# EAGLE board TopPanel-V4 (EAGLE 7.6.0)
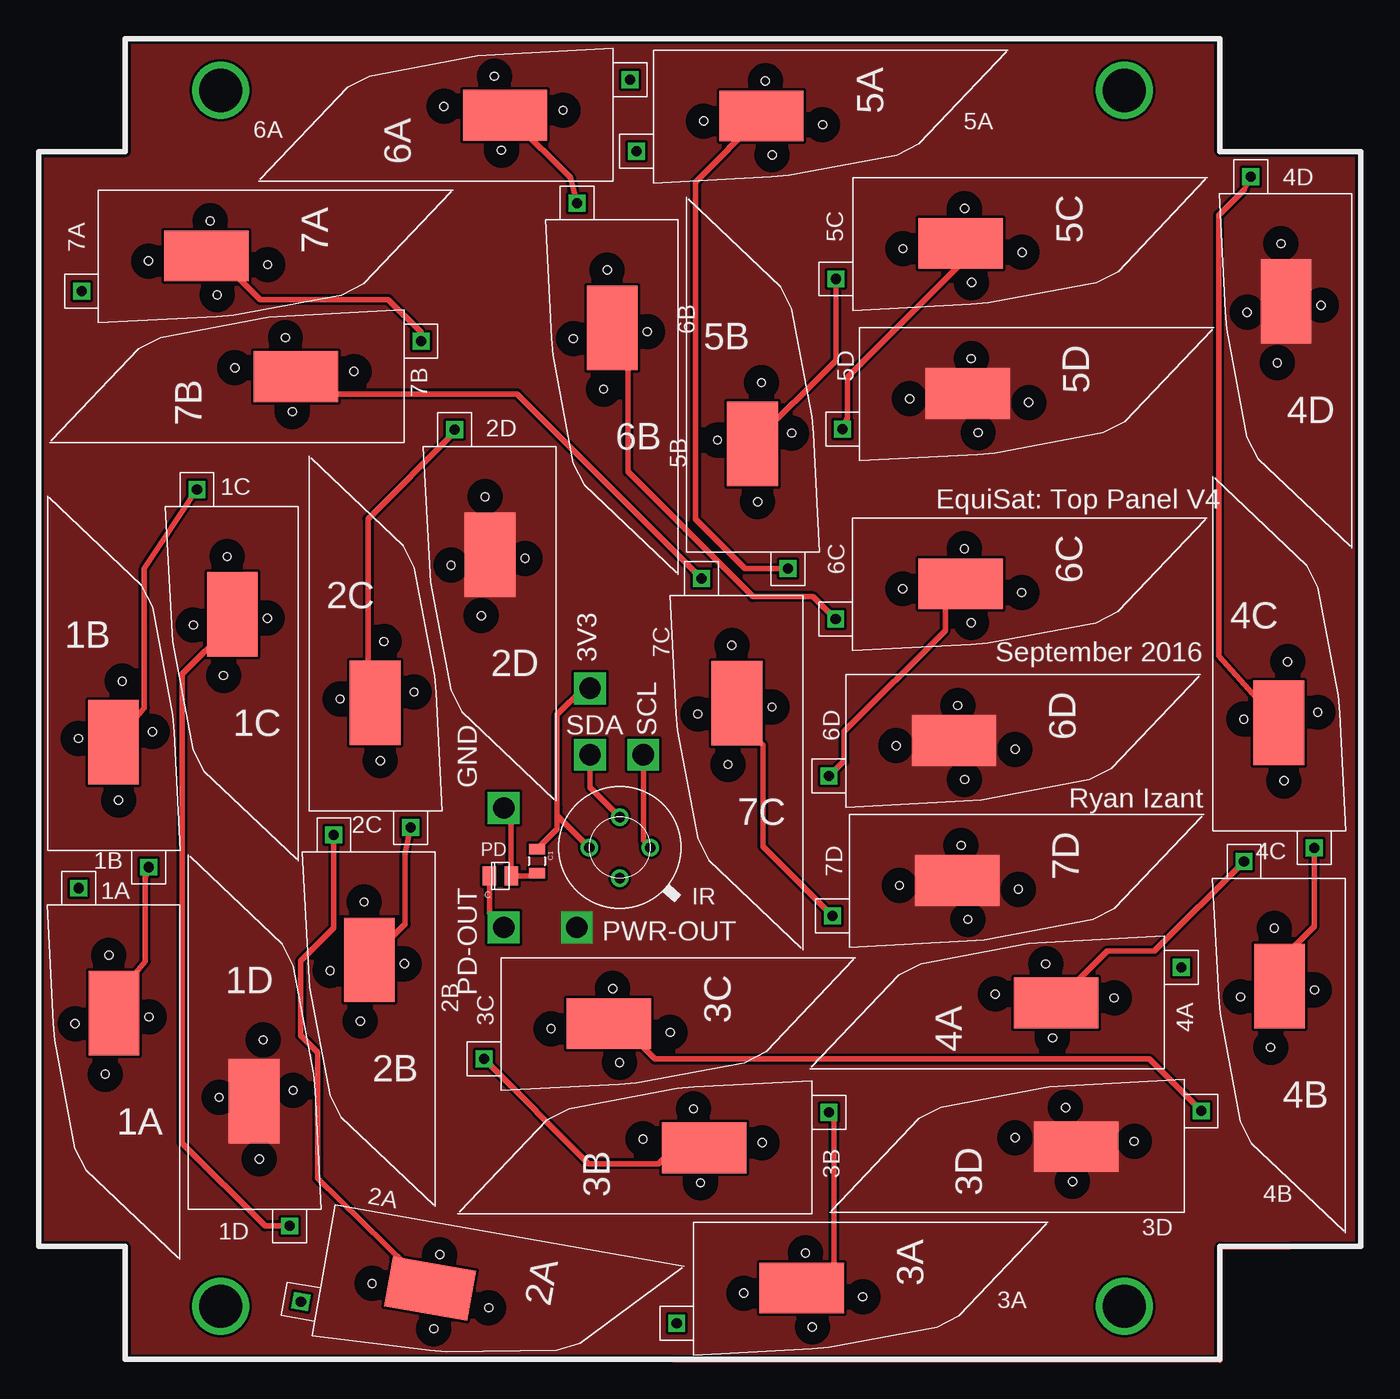
[diagram p0: board, top side]
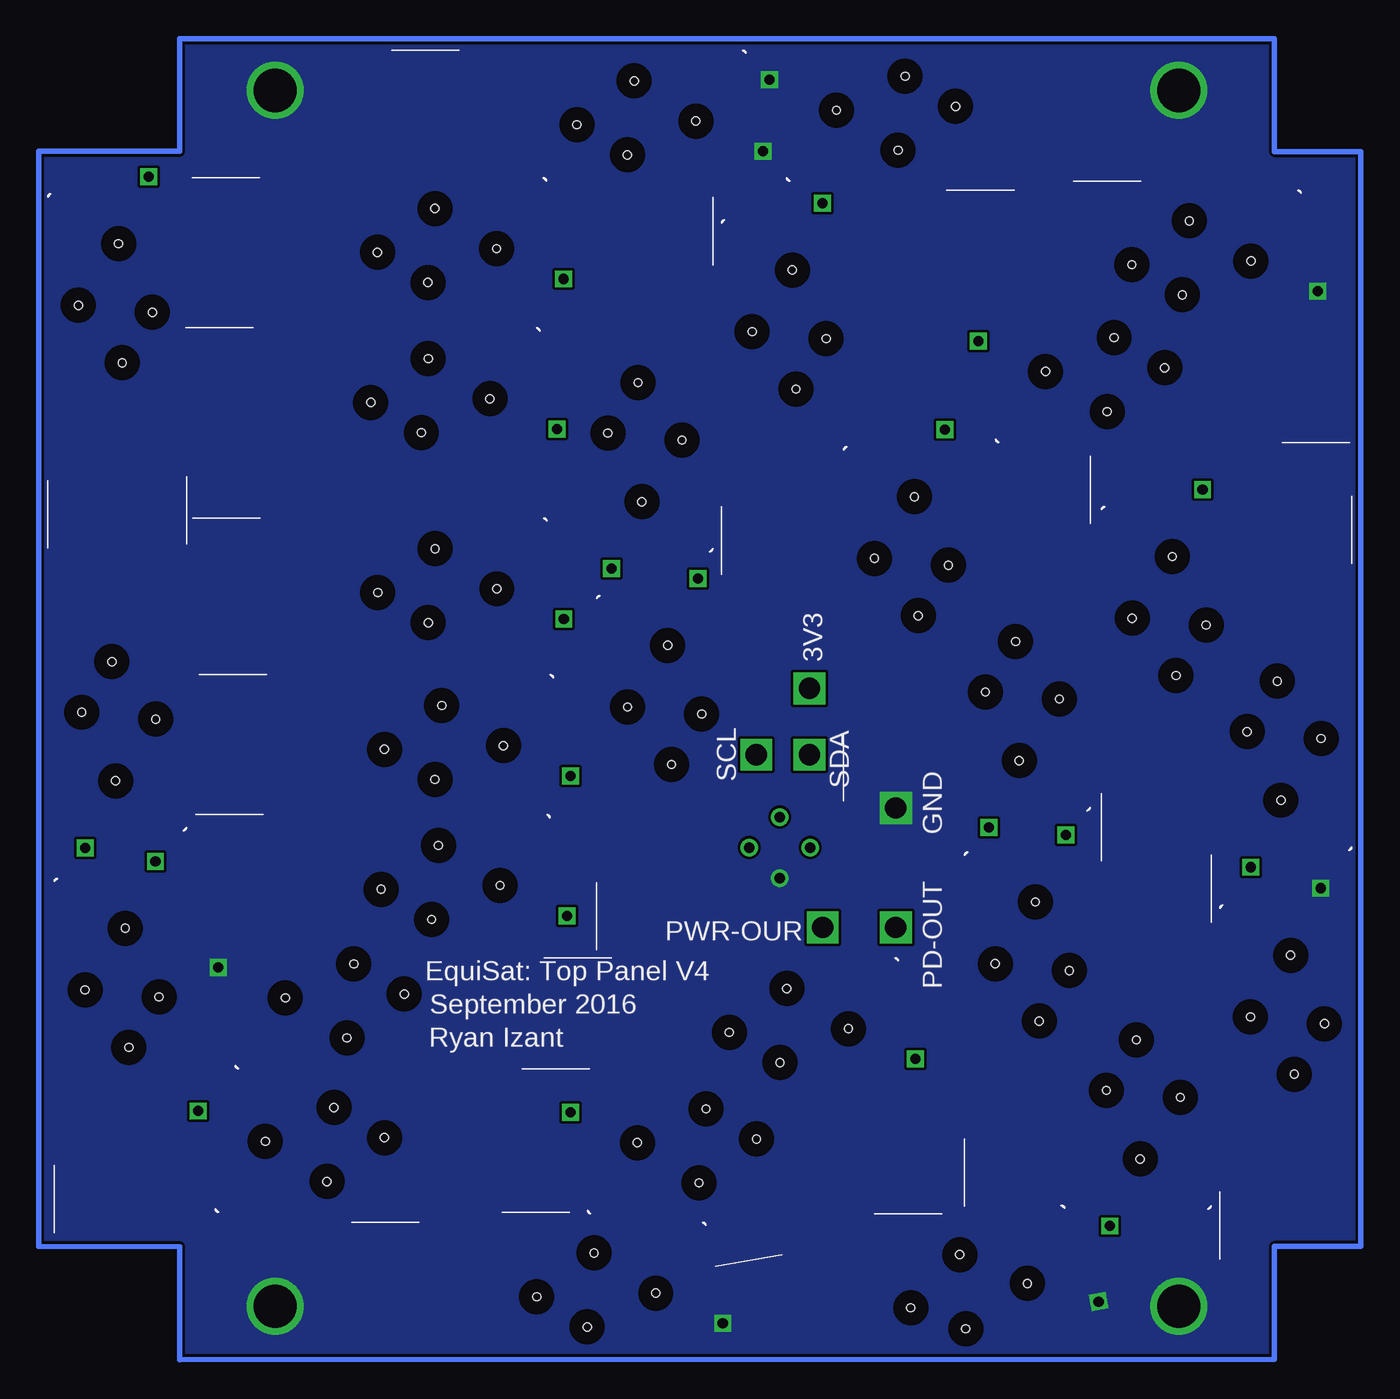
[diagram p1: board, bottom side, seen from below]

No outline drawn. Coordinates in mm, seen from the top.
Copper layers (1*16): Top 0.035mm / dielectric 1.5mm / Bottom 0.035mm
Design rules "default": minimum track width 10mil, minimum drill 24mil, track to track 8mil, track to pad 8mil, pad to pad 8mil, via to via 8mil, smd to smd 8mil, copper to edge 40mil, drill to drill 8mil, minimum pad ring 10mil, minimum via ring 8mil, stop-mask expansion 4mil, vias tented up to drill 0mil, thermal gap 10mil

## Footprints (pad centres in the part's own frame; a part is rotated, then mirrored left to right if it is on the bottom)
SOLARCELL2 = drill 0.76 square: A 7.62,-1.27 | smd 3.81 x 6.35: C 4.953,8.128 | hole 0.6: 2.32,8.41; 5.62,12.73; 7.89,8.93; 5.34,3.77
0805 = smd 0.8 x 1.2: 1 -0.9,0; 2 0.9,0
MXL90620 = drill 0.8: SCL 2.293,0; VDD -2.293,0; VSS 0,-2.294 | drill 0.8 pad 1.2: SDA 0,2.294
PHOTODECTORDEVICE2 = smd 1 x 1.45: A 0.76,0.4; C -0.88,0.4

## Placement (x,y rotation side)
1A  NEWSOLARPANEL  [SOLARCELL2]  4.13,34.19 180 top
1B  NEWSOLARPANEL  [SOLARCELL2]  -5.83,38.31 0 top
1C  NEWSOLARPANEL  [SOLARCELL2]  13.03,64.19 180 top
1D  NEWSOLARPANEL  [SOLARCELL2]  4.77,11.31 0 top
2A  NEWSOLARPANEL  [SOLARCELL2]  15.81,11.63 260 top
2B  NEWSOLARPANEL  [SOLARCELL2]  23.33,38.19 180 top
2C  NEWSOLARPANEL  [SOLARCELL2]  13.87,41.29 0 top
2D  NEWSOLARPANEL  [SOLARCELL2]  32.43,68.69 180 top
3A  NEWSOLARPANEL  [SOLARCELL2]  42.79,10.33 270 top
3B  NEWSOLARPANEL  [SOLARCELL2]  51.71,10.97 90 top
3C  NEWSOLARPANEL  [SOLARCELL2]  28.29,30.23 270 top
3D  NEWSOLARPANEL  [SOLARCELL2]  79.71,11.07 90 top
4A  NEWSOLARPANEL  [SOLARCELL2]  78.21,21.87 90 top
4B  NEWSOLARPANEL  [SOLARCELL2]  91.83,36.21 180 top
4C  NEWSOLARPANEL  [SOLARCELL2]  81.87,39.77 0 top
4D  NEWSOLARPANEL  [SOLARCELL2]  92.33,87.73 180 top
5A  NEWSOLARPANEL  [SOLARCELL2]  39.77,98.53 270 top
5B  NEWSOLARPANEL  [SOLARCELL2]  42.27,60.77 0 top
5C  NEWSOLARPANEL  [SOLARCELL2]  54.77,88.93 270 top
5D  NEWSOLARPANEL  [SOLARCELL2]  55.27,77.63 270 top
6A  NEWSOLARPANEL  [SOLARCELL2]  36.73,88.67 90 top
6B  NEWSOLARPANEL  [SOLARCELL2]  41.63,85.75 180 top
6C  NEWSOLARPANEL  [SOLARCELL2]  54.75,63.33 270 top
6D  NEWSOLARPANEL  [SOLARCELL2]  54.25,51.53 270 top
7A  NEWSOLARPANEL  [SOLARCELL2]  -2,88 270 top
7B  NEWSOLARPANEL  [SOLARCELL2]  21,69 90 top
7C  NEWSOLARPANEL  [SOLARCELL2]  51,57.5 180 top
7D  NEWSOLARPANEL  [SOLARCELL2]  54.5,41 270 top
C1  0.1uF  [0805]  31,37.5 270 top
IR  MXL90620  [MXL90620]  37.23,38.52 0 top
PD  PHOTODETECTOR  [PHOTODECTORDEVICE2]  28.3,35.98 0 top

## Library data of the parts
1A 1B 1C 1D 2A 2B 2C 2D 3A 3B 3C 3D 4A 4B 4C 4D 5A 5B 5C 5D 6A 6B 6C 6D 7A 7B 7C 7D PD = Solar Panel Parts
C1 IR = CNTRL_BOARD

## Nets
2D: 2C.C 2D.A
3V3: C1.1 IR.VDD
GND: 1A.A 2A.A 3A.A 4A.A 5A.A 6A.A 7A.A C1.2 IR.VSS PD.A
N$1: 1A.C 1B.A
N$2: 1B.C 1C.A
N$3: 1C.C 1D.A
N$4: 7A.C 7B.A
N$5: 7B.C 7C.A
N$6: 2A.C 2B.A
N$7: 2B.C 2C.A
N$8: 7C.C 7D.A
N$11: 3A.C 3B.A
N$12: 3B.C 3C.A
N$13: 3C.C 3D.A
N$16: 4A.C 4B.A
N$17: 4B.C 4C.A
N$18: 4C.C 4D.A
N$21: 5A.C 5B.A
N$22: 5B.C 5C.A
N$23: 5C.C 5D.A
N$26: 6A.C 6B.A
N$27: 6B.C 6C.A
N$28: 6C.C 6D.A
PD-OUT: PD.C
PWR-OUT: 1D.C 2D.C 3D.C 4D.C 5D.C 6D.C 7D.C
SCL: IR.SCL
SDA: IR.SDA

## Tracks (layer width: path | path; a pad name or v marks a point on that pad's centre or on a via)
2D
  Top 0.406: 2D.A 24.81,69.77 18.29,63.25 18.29,49.02 18.8,48.51 19.23,48.51 2C.C
3V3  (via drill 1.6)
  Top 0.406: IR.VDD 32.51,40.95 | 32.51,40.95 32.51,41.5 32.51,48.51 34.5,50.5 v35,50.5 | C1.1 32.51,39.91 32.51,40.95
GND  (via drill 1.6, 3.26)
  Top 0.406: C1.2 30.78,36.38 PD.A 29.06,40.94 v28.5,41.5
  other vias: 7.2,95.5 75.2,95.5 7.2,4 75.2,4
  pour Bottom (no thermals): -22,112 -22,-16 117,-16 117,112
N$1
  Top 0.406: 1A.C -0.82,27.12 1.52,29.96 1.52,36.27 1B.A
N$2
  Top 0.406: 1B.C -0.38,46.86 1.46,49.02 1.46,59.51 1C.A
N$3
  Top 0.406: 1D.A 10.53,10.04 4.32,16.26 4.32,51.56 7.87,55.12 7.87,55.86 1C.C
N$4
  Top 0.406: 7B.A 22.27,77.3 19.81,79.76 10.16,79.76 7.11,82.8 6.37,82.8 7A.C
N$5
  Top 0.406: 7C.A 29.51,72.64 15.49,72.64 14.48,73.66 13.97,73.66 13.68,73.95 7B.C
N$6
  Top 0.406: 2B.A 15.71,32.47 13.21,29.97 13.21,24.38 14.48,23.11 14.48,13.64 2A.C
N$7
  Top 0.406: 2B.C 21.08,32.77 21.08,38.11 2C.A
N$8
  Top 0.406: 7D.A 48.01,38.6 48.01,46.23 46.48,47.75 46.48,49.02 45.72,49.78 45.72,50.04 46.05,49.71 7C.C
N$9
  Top 0.406: 0,90.9 0,99.39 82.39,99.35 82.39,90.9 92.98,90.9 93,8.5 82.4,8.45 82.4,-0.05 0,0 0,8.5 -6.5,8.5 -6.5,90.9 0.02,90.9
N$10
  Bottom 0.406: -6.5,90.9 -6.5,8.5 0,8.5 0,0 82.4,-0.01 82.4,8.49 93,8.5 93,90.91 82.4,90.91 82.4,99.39 0,99.39 0,90.9 -6.5,90.9
N$11
  Top 0.406: 3A.C 51.86,5.38 53.34,6.86 53.34,18.95 3B.A
N$12
  Top 0.406: 3B.C 41.82,16.42 40.13,14.73 34.9,14.73 3C.A
N$13
  Top 0.406: 3C.C 37.21,25.28 39.88,22.61 77.06,22.61 3D.A
N$16
  Top 0.406: 4A.C 70.5,27.32 73.91,30.73 77.46,30.73 4B.A
N$17
  Top 0.406: 4B.C 85.88,28.98 89.49,32.59 4C.A
N$18
  Top 0.406: 4C.C 82.3,52.92 82.3,86.11 84.21,88.02 4D.A
N$21
  Top 0.406: 5A.C 42.93,88.61 42.93,63.25 46.67,59.5 5B.A
N$22
  Top 0.406: 5B.C 53.5,75.17 5C.A
N$23
  Top 0.406: 5D.A 54.36,70.87 54.36,73.91 62.9,82.46 5C.C
N$26
  Top 0.406: 6B.A 33.51,88.92 29.21,93.22 29.01,93.22 6A.C
N$27
  Top 0.406: 6C.A 51.79,57.4 47.24,57.4 37.85,66.8 37.85,75.44 36.18,77.11 6B.C
N$28
  Top 0.406: 6D.A 54.1,45.03 54.1,47.24 61.72,54.86 61.72,57.91 62.19,58.38 6C.C
PD-OUT  (via drill 1.6)
  Top 0.406: v28.5,32.5 27.42,33.58 PD.C
PWR-OUT  (via drill 1.6)
  other vias: 34,32.5
  pour Top (no thermals): -22,112 -22,-16.5 119.5,-16.5 119.5,112
SCL  (via drill 1.6)
  Top 0.406: IR.SCL 39,39.04 v39,45.5
SDA  (via drill 1.6)
  Top 0.406: IR.SDA 35,43.04 v35,45.5

## Text on the board
tPlace: EquiSat: Top Panel V4 | 3V3 | September 2016 | SCL | SDA | GND | Ryan Izant | PD-OUT | PWR-OUT
bPlace: 3V3 | SCL | SDA | GND | PD-OUT | PWR-OUR | EquiSat: Top Panel V4 | September 2016 | Ryan Izant